# Altium PCB PCB1.PcbDoc
Units mm, origin at the board's own origin, x right, y up, seen from the top; angles counter-clockwise.
Board outline 46.74 x 58.67 mm, 2 copper layers (Top Layer, Bottom Layer), stack 0.671 mm thick; 16 components, 15 nets, 64 pads, 1 vias.
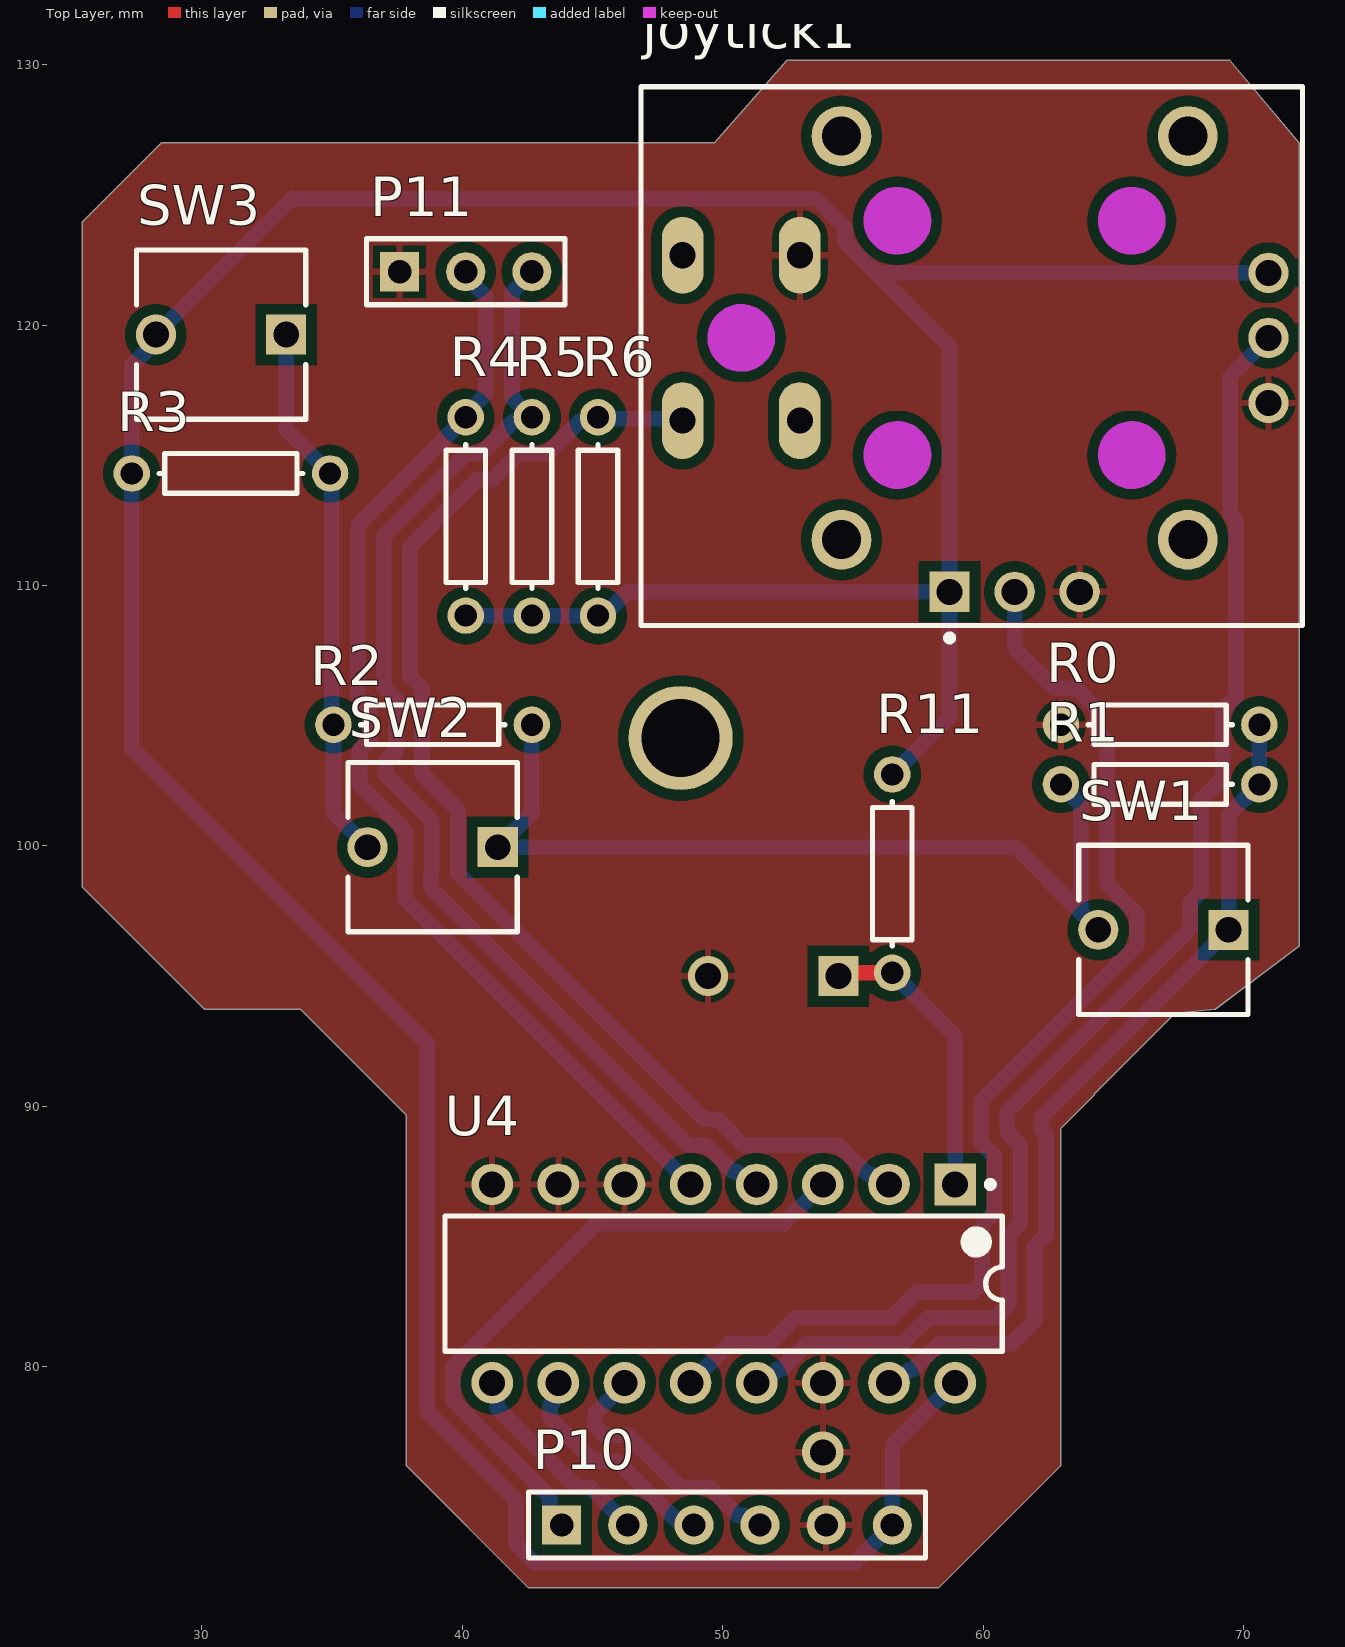
[diagram p0: Top Layer view]
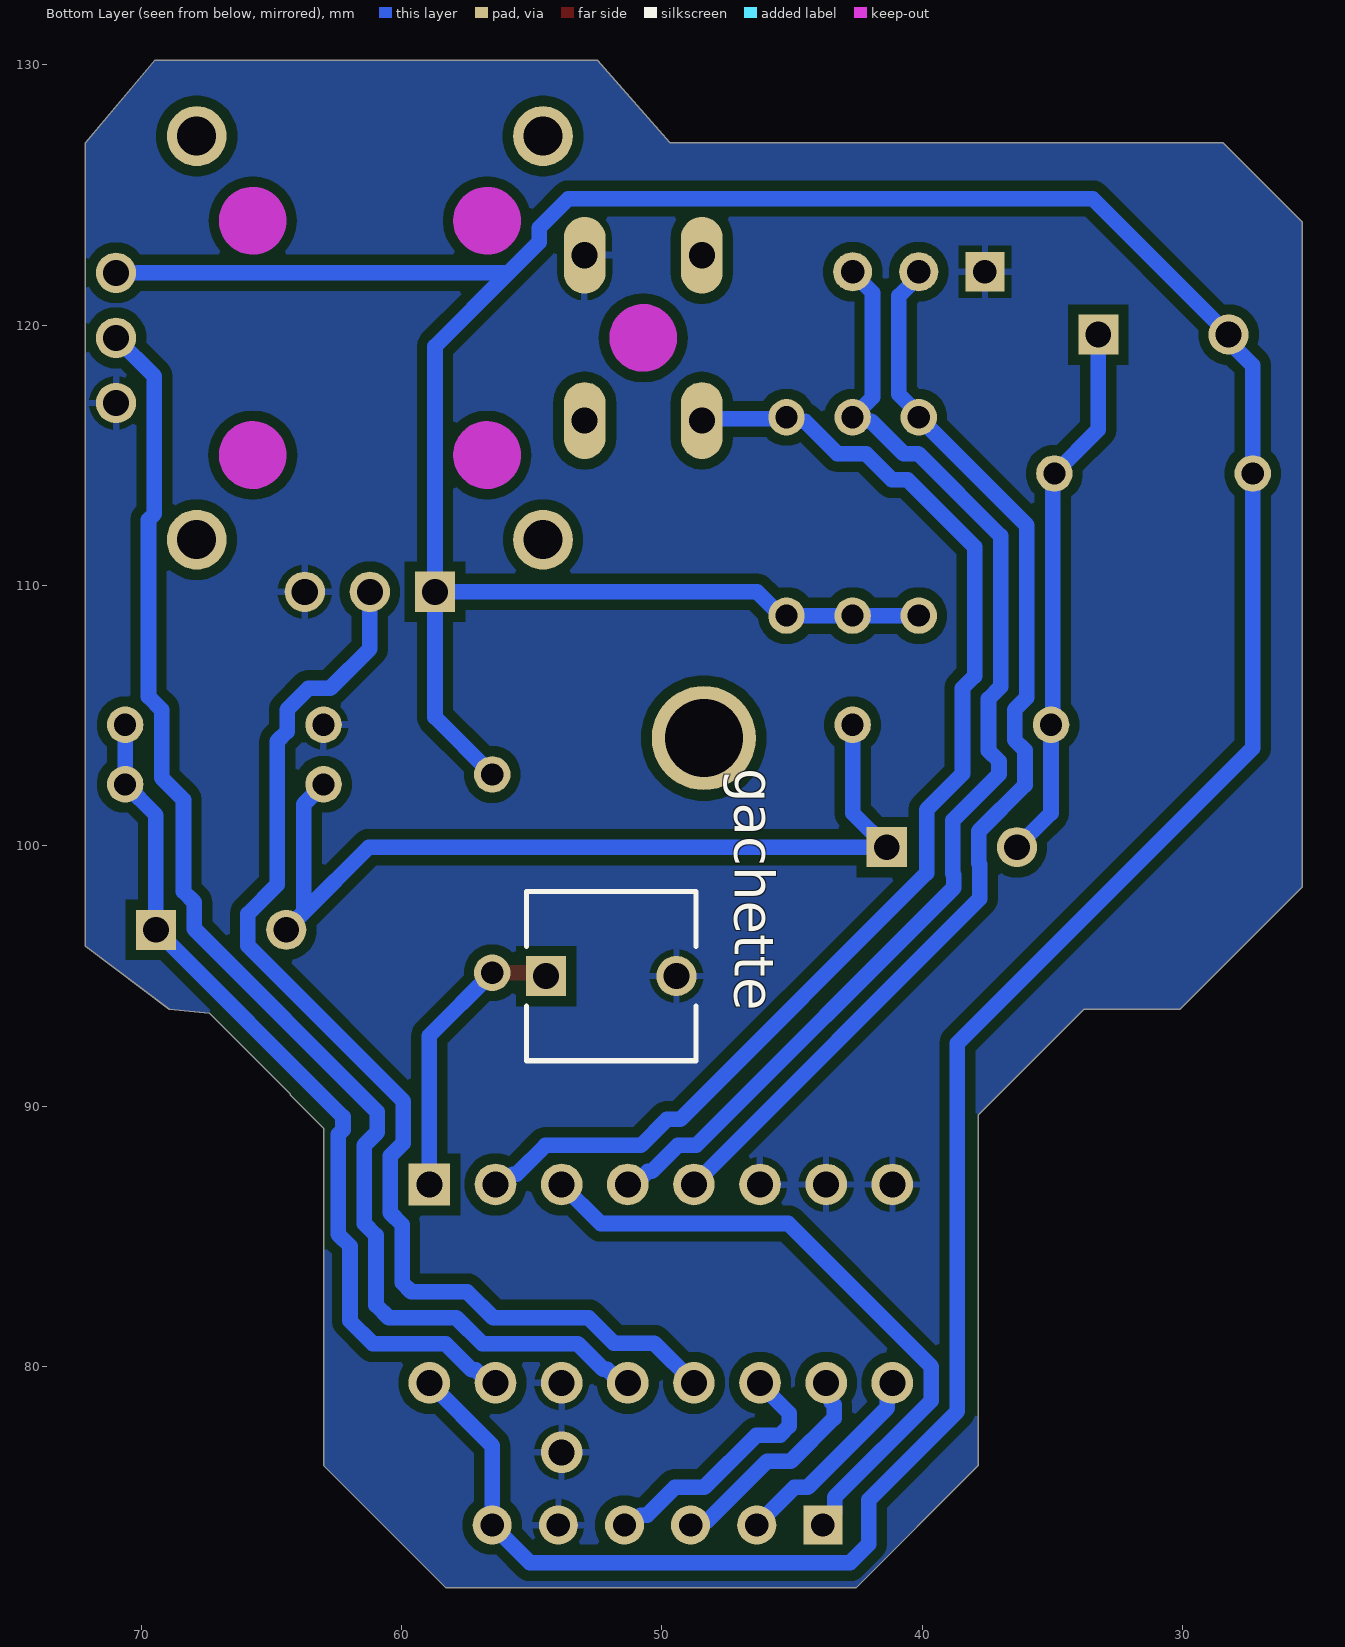
[diagram p1: Bottom Layer view, seen from below]

## Layer stack, top to bottom
Board Layer Stack Top Solder: solder mask 0.0254, SM-001, Dk 4
Top Layer: signal copper 0.0356
Dielectric 1: dielectric 0.6, FR-4, Dk 4.8
Bottom Layer: signal copper 0.0356
Board Layer Stack Bottom Solder: solder mask 0.0254, SM-001, Dk 4

## Board outline
37.846,76.2 37.846,89.662 33.782,93.726 30.099,93.726 25.4,98.425 25.4,123.952 28.448,127 49.682,127 52.476,130.175 69.469,130.175 72.136,127 72.136,96.139 68.919,93.726 67.373,93.57 64.262,90.459 64.262,90.424 62.992,89.154 62.992,76.2 58.293,71.501 42.545,71.501

## Design rules (kind name [scope] priority, off if disabled: settings)
Clearance [All] p1: gap=0.4 ignorepadtopadclearanceinfootprint=FALSE
PolygonConnect [All] p1: connectstyle=Relief reliefconductorwidth=0.254 reliefentries=4 polygonreliefangle="90 Angle" airgapwidth=0.254
RoutingVias [All] p1: holewidth=0.711 width=1.27 viastyle="Through Hole" minholewidth=0.711 minwidth=1.27 maxholewidth=0.711 maxwidth=1.27
SolderMaskExpansion [All] p1: expansion=0.102 istentingtop=FALSE
Width [All] p1: maxlimit=1 minlimit=0.254 preferedwidth=0.6 minimp=50.000000 maximp=50.000000 favimp=50.000000
30 further rules are at their usual default settings.

## Components (designator, comment, footprint, x,y, rotation, side; value= is the part's Value field where it differs from the comment)
gachette "FSM4JRT" FP-FSM4JRT-MFG 51.943,94.996 r180 bottom
joytick1 "RKJXK122400Y" FP-RKJXK122400Y-MFG 61.214,119.507 r270 top
P10 "Header 6" HDR1X6 43.815,73.914 r0 top
P11 "Header 3" HDR1X3 37.592,122.047 r0 top
R0 "Res1" AXIAL-0.3 66.802,104.648 r0 top value=1K
R1 "Res1" AXIAL-0.3 66.802,102.362 r180 top value=1K
R2 "Res1" AXIAL-0.3 38.862,104.648 r180 top value=1K
R3 "Res1" AXIAL-0.3 31.115,114.3 r180 top value=1K
R4 "Res1" AXIAL-0.3 40.132,112.649 r270 top value=1K
R5 "Res1" AXIAL-0.3 42.672,112.649 r270 top value=1K
R6 "Res1" AXIAL-0.3 45.212,112.649 r270 top value=1K
R11 "Res1" AXIAL-0.3 56.515,98.933 r90 top value=1K
SW1 "FSM4JRT" FP-FSM4JRT-MFG 66.929,96.774 r180 top
SW2 "FSM4JRT" FP-FSM4JRT-MFG 38.862,99.949 r180 top
SW3 "FSM4JRT" FP-FSM4JRT-MFG 30.734,119.634 r180 top
U4 "CD4051BF" J0016A 50.038,83.185 r270 top

## Footprints (in the part's own frame and the unit in brackets; to place one, negate y for a bottom-side part, rotate by r counter-clockwise, add the part's x,y. Pads: shape width x height; smd on the part's side, far side on the other; paste and mask are expansions set on the pad)
AXIAL-0.3 [mm] "Axial Device, Thru-Hole; 2 Leads; 0.3 in Pin Spacing"
  round 1.4 hole 0.85: 1(-3.81,0) 2(3.81,0)
  silkscreen extent -2.77,-0.76 2.77,0.76
FP-FSM4JRT-MFG [mil]
  rect 60.65x60.65 hole 39 paste-39370.1 mask+0: 1(-98.5,0)
  round 60.65 hole 39 paste-39370.1 mask+0: 2(98.5,0)
  silkscreen extent -128,-128 128,128, body extent -122,-122 122,122, height 209
FP-RKJXK122400Y-MFG [mm]
  round 2.3 hole 1.5 paste-1000 mask+0: 1(-7.75,6.65) 2(7.75,6.65) 3(-7.75,-6.65) 4(7.75,-6.65)
  rect 1.55x1.55 hole 1 paste-1000 mask+0: 1_VR1(9.75,-2.5)
  round 1.55 hole 1 paste-1000 mask+0: 1_VR2(2.5,9.75) 2_VR1(9.75,0) 2_VR2(0,9.75) 3_VR1(9.75,2.5) 3_VR2(-2.5,9.75)
  rrect100% 2.95x1.6 hole 1 paste-1000 mask+0: a(-3.175,-8.25) b(-3.175,-12.75) c(3.175,-8.25) d(3.175,-12.75)
  Keep-Out Layer circle w1.3: c-4.5,4.5 r0.65
  Keep-Out Layer circle w1.3: c4.5,4.5 r0.65
  Keep-Out Layer circle w1.3: c-4.5,-4.5 r0.65
  Keep-Out Layer circle w1.3: c4.5,-4.5 r0.65
  Keep-Out Layer circle w1.3: c0,-10.5 r0.65
  silkscreen extent -9.65,-14.35 11.65,11.05, body extent -9.75,-14.45 11.15,11.15, height 0.25
HDR1X3 [mm] "Connector; Header; 3 Position"
  rect 1.5x1.5 hole 0.9: 1(0,0)
  round 1.5 hole 0.9: 2(2.54,0) 3(5.08,0)
  silkscreen extent -1.27,-1.27 6.35,1.27
HDR1X6 [mm] "Connector; Header; 6 Position"
  rect 1.5x1.5 hole 0.9: 1(0,0)
  round 1.5 hole 0.9: 2(2.54,0) 3(5.08,0) 4(7.62,0) 5(10.16,0) 6(12.7,0)
  silkscreen extent -1.27,-1.27 13.97,1.27
J0016A [mm] "DIP, 16-Leads, Body 21.35x7.2mm, Pitch 2.54mm"
  rect 1.6x1.6 hole 1: 1(-3.81,8.89)
  round 1.6 hole 1: 2(-3.81,6.35) 3(-3.81,3.81) 4(-3.81,1.27) 5(-3.81,-1.27) 6(-3.81,-3.81) 7(-3.81,-6.35) 8(-3.81,-8.89) 9(3.81,-8.89) 10(3.81,-6.35) 11(3.81,-3.81) 12(3.81,-1.27) 13(3.81,1.27) 14(3.81,3.81) 15(3.81,6.35) 16(3.81,8.89)
  silkscreen extent -3.93,-10.7 2.6,10.7, body extent -3.96,-10.68 3.96,10.68, height 5.08

## Part data
gachette SW1 SW2 SW3: library part CMP-03407-000038-1, "SWITCH TACTILE SPST-NO 0.05A 24V", Case/Package=Radial, Contact Current Rating=50mA, Contact Resistance=100mR, Max Operating Temperature=105°C, Max Voltage Rating (DC)=12V, Min Operating Temperature=-35°C, Operating Force=1.57N, Package Quantity=10000, Actuator Diameter=3.5mm, Actuator Length=0.055inch, Actuator Material=Resin, Actuator Type=Standard, Contact Material="Copper Alloy", Contact Plating=Silver, Current Rating=50mA, Depth=6.19mm, Electrical Life=100000Cycles, Illumination Type=Non-Illuminated, Length=6.19mm, Max Current Rating=50mA, Mechanical Life=100000Cycles, Mount="Through Hole", Orientation=Straight, Packaging="Tape and Reel", Radiation Hardening=No, RoHS Compliant=Yes, Series=FSMJRT, Switch Function=Off-Mom, Switch Travel=0.25mm, Termination="PC Pins", Throw Configuration=SPST, Type=Switch, Voltage Rating (DC)=12V
joytick1: library part CMP-24118-000005-1, "Res POT 10K Ohm 0.0125W (25.4 X 20.7 X 19.3mm) Pin Bracket Mount/Through Hole Tray", Contact Current Rating=50mA, Insulation Resistance=100MR, Max Operating Temperature=70°C, Min Operating Temperature=-10°C, Package Quantity=1000, Power Rating=12.5mW, Resistance=10kR, Resistor Type=Potentiometer, Current Rating=50mA, Depth=20.7mm, Height=12.9mm, Length=16mm, Life (Hours)=100Hour, Military Standard=Not, Mount="Through Hole", Packaging=Tray, Radiation Hardening=No, RoHS Compliant=Yes, Series="RKJXV/ RKJXK", Termination=Pin, Type=Potentiometer, Width=16mm
P10: "Header, 6-Pin", LatestRevisionDate=17-Jul-2002, LatestRevisionNote="Re-released for DXP Platform.", Publisher="Altium Limited"
P11: "Header, 3-Pin", LatestRevisionDate=17-Jul-2002, LatestRevisionNote="Re-released for DXP Platform.", Publisher="Altium Limited"
R0 R1 R2 R3 R4 R5 R6 R11: "Resistor", LatestRevisionDate=17-Jul-2002, LatestRevisionNote="Re-released for DXP Platform.", PackageDescription="Axial Device, Thru-Hole; 2 Leads; 0.3 in Pin Spacing", PackageReference=AXIAL-0.3, Published=8-Jun-2000, Publisher="Altium Limited"
U4: library part CMP-1575-00057-4, "CMOS Single 8-Channel Analog Multiplexer/Demultiplexer with Logic-Level Conversion, J0016A, TUBE", Generic Part Number=CD4051B-MIL, Manufacturer="Texas Instruments", Operating Temperature Range(C)="-55 to 125", Rating=Military, Bandwidth(Max)(MHz)=20, Configuration="1 X 1：8 MUX", Crosstalk=Yes, DatasheetVersion=SCHS047G, ICC(Typ)(mA)=0.00008, PackageReference=J0016A, PackageVersion=http://www.ti.com/lit/ml/mcer002d/mcer002d.pdf, Ron(Max)(Ohms)=240, Ron(Typ)(Ohms)=125, VCC(Max)(V)=18, VCC(Min)(V)=5

## Free pads (board coordinates)
  round 4 hole 3: 2(48.387,104.14)

## Via types
v1: diameter 1.6, hole 1, Top Layer to Bottom Layer, 1 vias

## Nets (pads, with @x,y where several pads share a name; then routed paths per layer and width w, separated by ;. In a path a pad name is that pad's centre, name@x,y a point inside that pad or via, vN(x,y) a via of type N, cw(c..) or ccw(c..) an arc to the next point about the centre after c; other vN are vias at no path point)
A: P10.4 U4.11 | length 10
  Bottom Layer w0.6: U4.11 46.228,79.33 45.111,78.213 45.111,77.715 45.462,77.364 46.37,77.364 48.37,75.364 49.496,75.364 50.569,74.29 50.815,74.29 51.191,73.914 P10.4
B: P10.3 U4.10 | length 8.7
  Bottom Layer w0.6: U4.10 43.497,79.184 43.497,78.635 43.386,78.524 43.386,78.026 45.048,76.364 45.956,76.364 48.233,74.086 48.723,74.086 P10.3
BP_joy: joytick1.d R6.1 U4.2 | length 47.4
  Bottom Layer w0.6: joytick1.d 48.401,116.395 45.276,116.395 R6.1 45.059,116.306 44.499,116.306 43.252,115.059 42.161,115.059 41.161,114.059 40.56,114.059 37.988,111.487 37.988,106.52 38.452,106.056 38.452,102.765 39.83,101.386 39.83,98.952 49.287,89.495 49.804,89.495 50.804,88.495 54.469,88.495 55.577,87.388 55.725,87.388 56.117,86.995 U4.2
C: P10.2 U4.9 | length 7.9
  Bottom Layer w0.6: U4.9 41.339,79.184 41.339,78.422 44.397,75.364 44.905,75.364 P10.2
com4: P10.1 U4.3 | length 24.9
  Bottom Layer w0.6: P10.1 43.365,74.364 43.365,74.982 39.648,78.699 39.648,79.996 40.527,80.875 45.147,85.495 52.348,85.495 U4.3
GND: gachette.2 joytick1.1_VR2 joytick1.3_VR1 joytick1.a P10.5 P11.1 R0.1 U4.6 U4.7 U4.8 U4.14
  other v1: 53.848,76.708
Netgachette_1: gachette.1 R11.1 U4.1 | length 11.4
  Top Layer w0.6: gachette.1 54.915,95.123 R11.1
  Bottom Layer w0.6: gachette.1 gachette.1@54.508,95.059 ; R11.1@56.451,95.059 R11.1 58.928,92.71 U4.1
Netjoytick1_2_VR1: joytick1.2_VR1 U4.12 | length 44.6
  Bottom Layer w0.6: U4.12 50.292,80.899 51.836,80.899 52.812,81.875 56.478,81.875 57.478,82.875 59.625,82.875 59.976,83.226 59.976,85.453 60.428,85.905 60.428,88.085 59.928,88.585 59.928,90.196 65.897,96.165 65.897,97.383 64.77,98.51 64.77,104.013 64.392,104.391 64.392,105.228 63.572,106.048 62.735,106.048 61.214,107.569 joytick1.2_VR1
Netjoytick1_2_VR2: joytick1.2_VR2 U4.13 | length 52.8
  Bottom Layer w0.6: U4.13 51.579,79.375 52.103,79.899 52.251,79.899 53.227,80.875 54.469,80.875 56.892,80.875 57.892,81.875 60.491,81.875 60.976,82.36 60.976,85.039 61.428,85.491 61.428,88.499 60.928,88.999 60.928,89.781 67.961,96.814 67.961,97.834 68.371,98.244 68.371,101.772 69.212,102.613 69.212,105.228 69.714,105.73 69.714,112.523 69.489,112.748 69.489,118.032 joytick1.2_VR2
NetP11_2: P11.2 R4.1 U4.5 | length 43.1
  Bottom Layer w0.6: P11.2 40.132,121.881 40.894,121.119 40.894,117.337 40.132,116.575 R4.1 35.988,112.315 35.988,105.691 36.452,105.228 36.452,104.068 36.052,103.668 36.052,102.336 37.83,100.558 37.83,99.34 37.789,99.299 37.789,97.974 U4.5
NetP11_3: P11.3 R5.1 U4.4 | length 45.7
  Bottom Layer w0.6: P11.3 42.672,122.008 41.91,121.246 41.91,117.221 R5.1 42.519,116.306 41.959,116.306 40.712,115.059 40.146,115.059 36.988,111.901 36.988,106.106 37.452,105.642 37.452,103.654 37.052,103.254 37.052,102.751 38.83,100.972 38.83,98.926 38.789,98.885 38.789,98.388 48.682,88.495 48.873,88.495 49.389,88.495 50.389,87.495 50.537,87.495 51.037,86.995 U4.4
NetR0_2: R0.2 R1.1 SW1.1 U4.15 | length 33.2
  Bottom Layer w0.6: U4.15 56.659,79.375 57.159,79.875 57.307,79.875 58.307,80.875 61.097,80.875 61.976,81.754 61.976,84.625 62.428,85.077 62.428,88.913 62.248,89.094 62.248,89.591 SW1.1 69.431,101.181 R1.1 R0.2
NetR1_2: R1.2 R2.1 SW1.2 SW2.1 | length 34.8
  Bottom Layer w0.6: R2.1 42.672,101.257 SW2.1 61.252,99.949 63.754,97.447 ; R1.2 63.754,101.6 63.754,97.447 ; SW1.2 63.754,97.447
NetR2_2: R2.2 R3.1 SW2.2 SW3.1 | length 21
  Bottom Layer w0.6: SW3.1 33.236,115.989 R3.1 34.989,114.236 34.989,104.712 R2.2 35.052,101.257 SW2.2
VCC: joytick1.1_VR1 joytick1.3_VR2 P10.6 R3.2 R4.2 R5.2 R6.2 R11.2 SW3.2 U4.16 | length 161.5
  Bottom Layer w0.6: R4.2 R5.2 R6.2 45.428,108.839 46.346,109.757 joytick1.1_VR1 ; R11.2 58.714,104.942 joytick1.1_VR1 ; U4.16 56.515,76.962 P10.6 55.065,72.464 42.775,72.464 42.053,73.186 42.053,74.88 38.648,78.285 38.648,92.416 27.305,103.759 R3.2 27.305,118.452 28.232,119.379 SW3.2 33.455,124.857 53.585,124.857 54.714,123.728 54.714,123.179 55.886,122.007 ; joytick1.3_VR2 55.886,122.007 ; 55.886,122.007 58.714,119.179 joytick1.1_VR1
pads on no net: joytick1.1 joytick1.2 joytick1.3 joytick1.4 joytick1.b joytick1.c

## Polygon pours and split planes (outlines as drawn)
GND on Top Layer "GND_L01_P000" (solid, pour order 0): 28.448,127 49.682,127 52.476,130.175 69.469,130.175 69.647,129.964 72.136,127 72.136,96.139 68.919,93.726 67.373,93.57 62.992,89.154 62.992,76.2 58.293,71.501 42.545,71.501 37.846,76.2 37.846,89.662 33.782,93.726 30.099,93.726 25.4,98.425 25.4,123.952
GND on Bottom Layer "GND_L02_P001" (solid, pour order 1): 28.448,127 49.682,127 52.476,130.175 69.469,130.175 69.762,129.827 72.136,127 72.136,96.139 68.919,93.726 67.373,93.57 62.992,89.154 62.992,76.2 58.293,71.501 42.545,71.501 37.846,76.2 37.846,89.662 33.782,93.726 30.099,93.726 25.4,98.425 25.4,123.952

## Silkscreen, mask and mechanical layers (free items; w line width, h text height)
Mechanical 1:
  lines w0.254: 25.4,98.425 25.4,123.952 28.448,127 49.682,127 52.476,130.175 69.469,130.175 72.136,127 72.136,96.139 68.919,93.726 67.373,93.57 64.262,90.459 64.262,90.424 62.992,89.154 62.992,76.2 58.293,71.501 42.545,71.501 37.846,76.2 37.846,82.045 37.846,89.662 33.782,93.726 30.099,93.726 25.4,98.425